# EAGLE board CT_schematic (EAGLE 7.6.0)

Size 100 x 80 mm. Coordinates in mm from the lower left corner, seen from the top.
Outline: 0,0 100,0 100,80 0,80 0,0
Copper layers (1*16): Top 0.035mm / dielectric 1.5mm / Bottom 0.035mm
Design rules "default": minimum track width 10mil, minimum drill 24mil, track to track 8mil, track to pad 8mil, pad to pad 8mil, via to via 8mil, smd to smd 8mil, copper to edge 40mil, drill to drill 8mil, minimum pad ring 10mil, minimum via ring 8mil, stop-mask expansion 4mil, vias tented up to drill 0mil, thermal gap 10mil

## Footprints (pad centres in the part's own frame; a part is rotated, then mirrored left to right if it is on the bottom)
C0603 = smd 0.8 x 0.8: 1 -0.762,0; 2 0.762,0
C0402 = smd 0.5 x 0.5: 1 -0.508,0; 2 0.508,0
EXV-9B = smd 2.718 x 1.778: 1 -2.108,0; 2 2.108,0
EXV-9H = smd 3.505 x 1.676: 1 -2.857,0; 2 2.857,0
L0603 = smd 0.8 x 0.8: 1 -0.762,0; 2 0.762,0
L1210 = smd 1.2 x 2.5: 1 -1.524,0; 2 1.524,0
PJ-037B_PACKAGE = drill 3.7 square: 1 12,0 | drill 3.2 square: 2 6,0
R0603 = smd 0.8 x 0.8: 1 -0.762,0; 2 0.762,0
LQFP32 = smd 0.54 x 0.85: 1 -2.8,-4.275; 2 -2,-4.275; 3 -1.2,-4.275; 4 -0.4,-4.275; 5 0.4,-4.275; 6 1.19,-4.275; 7 1.99,-4.275; 8 2.79,-4.275; 17 2.8,4.275; 18 2,4.275; 19 1.2,4.275; 20 0.4,4.275; 21 -0.4,4.275; 22 -1.2,4.275; 23 -2,4.275; 24 -2.8,4.275 | smd 0.85 x 0.54: 9 4.275,-2.8; 10 4.275,-2; 11 4.275,-1.2; 12 4.275,-0.4; 13 4.275,0.4; 14 4.275,1.2; 15 4.275,2; 16 4.275,2.8; 25 -4.275,2.8; 26 -4.275,2; 27 -4.275,1.2; 28 -4.275,0.4; 29 -4.275,-0.4; 30 -4.275,-1.2; 31 -4.275,-2; 32 -4.275,-2.8
SSOP-16 = smd 1.981 x 0.356: 1 -2.464,2.223; 2 -2.464,1.587; 3 -2.464,0.953; 4 -2.464,0.318; 5 -2.464,-0.318; 6 -2.464,-0.953; 7 -2.464,-1.587; 8 -2.464,-2.223; 9 2.464,-2.223; 10 2.464,-1.587; 11 2.464,-0.953; 12 2.464,-0.318; 13 2.464,0.318; 14 2.464,0.953; 15 2.464,1.587; 16 2.464,2.223
HTSS-105-01-G-D = drill 1 pad 1.8 square: 1 0,0 | drill 1 pad 1.8: 2 0,2.54; 3 2.54,0; 4 2.54,2.54; 5 5.08,0; 6 5.08,2.54; 7 7.62,0; 8 7.62,2.54; 9 10.16,0; 10 10.16,2.54
SSOP-28 = smd 1.5 x 0.4: 1 -3.625,4.225; 2 -3.625,3.575; 3 -3.625,2.925; 4 -3.625,2.275; 5 -3.625,1.625; 6 -3.625,0.975; 7 -3.625,0.325; 8 -3.625,-0.325; 9 -3.625,-0.975; 10 -3.625,-1.625; 11 -3.625,-2.275; 12 -3.625,-2.925; 13 -3.625,-3.575; 14 -3.625,-4.225; 15 3.625,-4.225; 16 3.625,-3.575; 17 3.625,-2.925; 18 3.625,-2.275; 19 3.625,-1.625; 20 3.625,-0.975; 21 3.625,-0.325; 22 3.625,0.325; 23 3.625,0.975; 24 3.625,1.625; 25 3.625,2.275; 26 3.625,2.925; 27 3.625,3.575; 28 3.625,4.225
ABS07-32.768KHZ-7-T = smd 1.1 x 2.4: 1 -2.5,0; 2 0,0
ASFL1 = smd 1.7 x 1.5: 1 -1.27,-1.1; 2 1.27,-1.1; 3 1.27,1.1; 4 -1.27,1.1
LP2954 = smd 1.6 x 0.6: 1 -2.475,1.905 | smd 1.55 x 0.6: 2 -2.475,0.635; 3 -2.475,-0.635; 4 -2.475,-1.905; 5 2.475,-1.905; 6 2.475,-0.635; 7 2.475,0.635; 8 2.475,1.905
SON-6 = smd 0.55 x 0.3: 1 -0.355,0.5 | smd 0.52 x 0.3: 2 -0.37,0; 3 -0.37,-0.5; 4 0.37,-0.5; 5 0.37,0; 6 0.37,0.5
SW_4-1437565-2 = smd 1.4 x 2.1: 1 -2.23,4.55; 2 -2.23,-4.55; 3 2.23,4.55; 4 2.23,-4.55
LGM67K-G1J2-24-Z = smd 0.8 x 1.4: A -2,0; C 0,0
NC7SZ125M5X = smd 1.3 x 0.7: 1 -1.3,0.95; 2 -1.3,0; 3 -1.3,-0.95; 4 1.3,-0.95; 5 1.3,0.95

## Placement (x,y rotation side)
C1  1e-07  [C0603]  -46.99,63.5 0 top  (outside the outline)
C2  1e-07  [C0603]  -50.8,63.5 0 top  (outside the outline)
C3  1e-07  [C0603]  -54.61,63.5 0 top  (outside the outline)
C4  1e-07  [C0603]  -58.42,63.5 0 top  (outside the outline)
C5  4.7e-06  [C0603]  -39.37,63.5 0 top  (outside the outline)
C6  1e-08  [C0603]  -62.23,63.5 0 top  (outside the outline)
C7  1e-06  [C0603]  -66.04,63.5 0 top  (outside the outline)
C8  1e-11  [C0402]  -49.53,68.58 0 top  (outside the outline)
C9  1e-11  [C0402]  -53.34,68.58 0 top  (outside the outline)
C10  1e-06  [C0603]  -15.24,68.58 0 top  (outside the outline)
C11  1e-06  [C0603]  -19.05,68.58 0 top  (outside the outline)
C12  2.2e-07  [C0603]  -43.18,63.5 0 top  (outside the outline)
C13  1e-06  [C0603]  -22.86,68.58 0 top  (outside the outline)
C14  1e-06  [C0603]  -26.67,68.58 0 top  (outside the outline)
C15  1e-07  [C0402]  -57.15,68.58 0 top  (outside the outline)
C16  1e-07  [C0402]  -60.96,68.58 0 top  (outside the outline)
C17  1e-07  [C0402]  -64.77,68.58 0 top  (outside the outline)
C18  1e-07  [C0402]  -15.24,73.66 0 top  (outside the outline)
C19  1e-07  [C0402]  -19.05,73.66 0 top  (outside the outline)
C20  1e-08  [C0402]  -22.86,73.66 0 top  (outside the outline)
C21  1e-06  [EXV-9B]  -55.88,49.53 0 top  (outside the outline)
C22  2.2e-06  [EXV-9B]  -16.51,57.15 0 top  (outside the outline)
C23  1e-07  [C0402]  -26.67,73.66 0 top  (outside the outline)
C24  0.0001  [EXV-9H]  -35.56,41.91 0 top  (outside the outline)
C25  0.0001  [EXV-9H]  -46.99,41.91 0 top  (outside the outline)
C26  1e-08  [C0402]  -30.48,73.66 0 top  (outside the outline)
F1  240.0  [L0603]  -30.48,68.58 0 top  (outside the outline)
I1  1e-05  [L1210]  -48.26,49.53 0 top  (outside the outline)
J1  PJ-037B  [PJ-037B_PACKAGE]  -55.88,7.62 0 top  (outside the outline)
R1  10000.0  [R0603]  -20.32,63.5 0 top  (outside the outline)
R2  1000.0  [R0603]  -34.29,68.58 0 top  (outside the outline)
R3  1600.5  [R0603]  -38.1,68.58 0 top  (outside the outline)
R4  4700.0  [R0603]  -41.91,68.58 0 top  (outside the outline)
R5  10000.0  [R0603]  -25.4,63.5 0 top  (outside the outline)
R6  100000.0  [R0603]  -36.83,57.15 0 top  (outside the outline)
R7  100000.0  [R0603]  -41.91,57.15 0 top  (outside the outline)
R8  100000.0  [R0603]  -46.99,57.15 0 top  (outside the outline)
R9  100000.0  [R0603]  -52.07,57.15 0 top  (outside the outline)
R10  164658.62  [R0603]  -31.75,57.15 0 top  (outside the outline)
R11  100000.0  [R0603]  -57.15,57.15 0 top  (outside the outline)
R12  10000.0  [R0603]  -30.48,63.5 0 top  (outside the outline)
R13  10000.0  [R0603]  -35.56,63.5 0 top  (outside the outline)
R14  9100.0  [R0603]  -45.72,68.58 0 top  (outside the outline)
R15  680000.0  [R0603]  -62.23,57.15 0 top  (outside the outline)
R16  120000.0  [R0603]  -15.24,63.5 0 top  (outside the outline)
U1  STM32L011K4T6  [LQFP32]  -35.56,7.62 0 top  (outside the outline)
U2  LTC2804CGN-1#PBF  [SSOP-16]  -48.26,20.32 0 top  (outside the outline)
U3  HTSS-105-01-G-D  [HTSS-105-01-G-D]  -27.94,31.75 0 top  (outside the outline)
U4  ST3241EBPR  [SSOP-28]  -19.05,7.62 0 top  (outside the outline)
U5  HTSS-105-01-G-D  [HTSS-105-01-G-D]  -46.99,31.75 0 top  (outside the outline)
U6  ABS07-32.768KHZ-7-T  [ABS07-32.768KHZ-7-T]  -27.94,50.8 0 top  (outside the outline)
U7  ASFL1-12MHZ-NCS  [ASFL1]  -26.67,41.91 0 top  (outside the outline)
U8  LP2954AIMX/NOPB  [LP2954]  -62.23,33.02 0 top  (outside the outline)
U9  TPS3895ADRYR  [SON-6]  -33.02,72.39 0 top  (outside the outline)
U10  4-1437565-2  [SW_4-1437565-2]  -27.94,21.59 0 top  (outside the outline)
U11  Q65110A2395  [LGM67K-G1J2-24-Z]  -36.83,49.53 0 top  (outside the outline)
U12  nc7sz125m5x  [NC7SZ125M5X]  -24.13,57.15 0 top  (outside the outline)

## Library data of the parts
C1-C26 F1 I1 J1 R1-R16 U1-U12 = circuit_tree

## Nets
CLK_CRYSTAL_U1_2: C8.1 U1.2 U6.1
CLK_CRYSTAL_U1_3: C9.1 U1.3 U6.2
CLK_U1_6: U1.6 U7.3
GND: C1.2 C2.2 C3.2 C4.2 C5.2 C6.2 C7.2 C8.2 C9.2 C10.2 C11.2 C13.2 C14.2 C15.2 C18.2 C19.2 C20.2 C21.2 C22.2 C23.2 C24.2 C25.2 C26.2 J1.2 R2.2 R5.2 R11.2 R14.2 R16.2 U1.16 U1.32 U2.8 U3.9 U4.23 U4.25 U5.9 U7.2 U8.4 U9.2 U11.C U12.1 U12.3
NET_U1_4: R4.1 U1.4 U12.4
NET_U1_5: C6.1 C7.1 F1.1 U1.5
NET_U1_30: R3.1 U1.30 U11.A
NET_U1_31: R1.1 R5.1 U1.31 U10.3 U10.4
NET_U2_6: C10.1 U2.6
NET_U2_7: C12.1 I1.2 U2.7
NET_U2_9: C11.1 U2.9
NET_U2_10: C12.2 U2.10
NET_U2_11: R6.1 U2.11
NET_U3_3: U2.1 U3.3
NET_U3_4: U2.2 U3.4
NET_U3_5: U2.3 U3.5
NET_U3_6: U2.4 U3.6
NET_U4_1: C17.1 U4.1
NET_U4_2: C17.2 U4.2
NET_U4_3: C19.1 U4.3
NET_U4_22: R7.1 U4.22
NET_U4_24: C16.2 U4.24
NET_U4_27: C18.1 U4.27
NET_U4_28: C16.1 U4.28
NET_U5_3: U4.4 U5.3
NET_U5_4: U4.5 U5.4
NET_U5_5: U4.9 U5.5
NET_U5_6: U4.10 U5.6
NET_U8_3: R9.1 U8.3
NET_U8_5: R8.1 U8.5
NET_U8_7: R10.2 R11.1 U8.7
NET_U9_1: R13.1 R14.1 U9.1
NET_U9_3: R15.2 R16.1 U9.3
NET_U9_4: R12.1 U9.4 U12.2
NET_U10_1: R2.1 U10.1 U10.2
PROC_LPUART1_CTS: U1.12 U2.13
PROC_LPUART1_RTS: U1.15 U2.15
PROC_LPUART1_RX: U1.9 U2.16
PROC_LPUART1_TX: U1.7 U2.14
PROC_USART2_CTS: U1.13 U4.13
PROC_USART2_RTS: U1.14 U4.18
PROC_USART2_RX: U1.20 U4.19
PROC_USART2_TX: U1.8 U4.14
VCC_S1_15V0: C21.1 C24.1 C25.1 J1.1 R9.2 U8.8
VCC_TIER1_3V3: C1.1 C2.1 C3.1 C4.1 C5.1 C13.1 C14.1 C15.1 C20.1 C22.1 C23.1 C26.1 F1.2 I1.1 R1.2 R3.2 R4.2 R6.2 R7.2 R8.2 R10.1 R12.2 R13.2 R15.1 U1.1 U1.17 U2.5 U2.12 U4.26 U7.4 U8.1 U9.6 U12.5

## Tracks (layer width: path | path; a pad name or v marks a point on that pad's centre or on a via)
CLK_CRYSTAL_U1_2  (2 unrouted)
CLK_CRYSTAL_U1_3  (2 unrouted)
CLK_U1_6  (1 unrouted)
GND  (41 unrouted)
NET_U1_4  (2 unrouted)
NET_U1_5  (3 unrouted)
NET_U1_30  (2 unrouted)
NET_U1_31  (4 unrouted)
NET_U2_6  (1 unrouted)
NET_U2_7  (2 unrouted)
NET_U2_9  (1 unrouted)
NET_U2_10  (1 unrouted)
NET_U2_11  (1 unrouted)
NET_U3_3  (1 unrouted)
NET_U3_4  (1 unrouted)
NET_U3_5  (1 unrouted)
NET_U3_6  (1 unrouted)
NET_U4_1  (1 unrouted)
NET_U4_2  (1 unrouted)
NET_U4_3  (1 unrouted)
NET_U4_22  (1 unrouted)
NET_U4_24  (1 unrouted)
NET_U4_27  (1 unrouted)
NET_U4_28  (1 unrouted)
NET_U5_3  (1 unrouted)
NET_U5_4  (1 unrouted)
NET_U5_5  (1 unrouted)
NET_U5_6  (1 unrouted)
NET_U8_3  (1 unrouted)
NET_U8_5  (1 unrouted)
NET_U8_7  (2 unrouted)
NET_U9_1  (2 unrouted)
NET_U9_3  (2 unrouted)
NET_U9_4  (2 unrouted)
NET_U10_1  (2 unrouted)
PROC_LPUART1_CTS  (1 unrouted)
PROC_LPUART1_RTS  (1 unrouted)
PROC_LPUART1_RX  (1 unrouted)
PROC_LPUART1_TX  (1 unrouted)
PROC_USART2_CTS  (1 unrouted)
PROC_USART2_RTS  (1 unrouted)
PROC_USART2_RX  (1 unrouted)
PROC_USART2_TX  (1 unrouted)
VCC_S1_15V0  (5 unrouted)
VCC_TIER1_3V3  (32 unrouted)